# Altium PCB pressure-sensor.PcbDoc
Units mm, origin at the board's own origin, x right, y up, seen from the top; angles counter-clockwise.
Board outline 19.68 x 10.61 mm, 2 copper layers (Top Layer, Bottom Layer); 2 components, 6 nets, 12 pads, 0 vias.
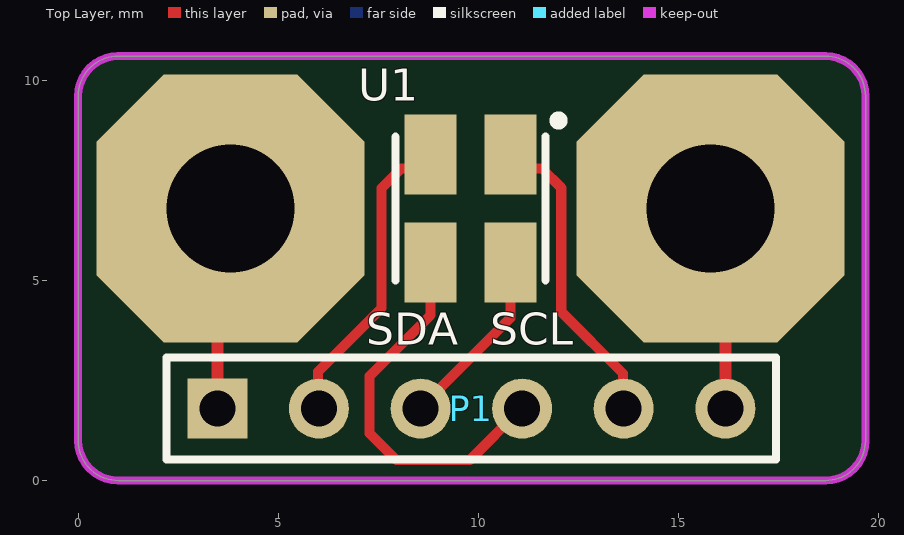
[diagram p0: Top Layer view]
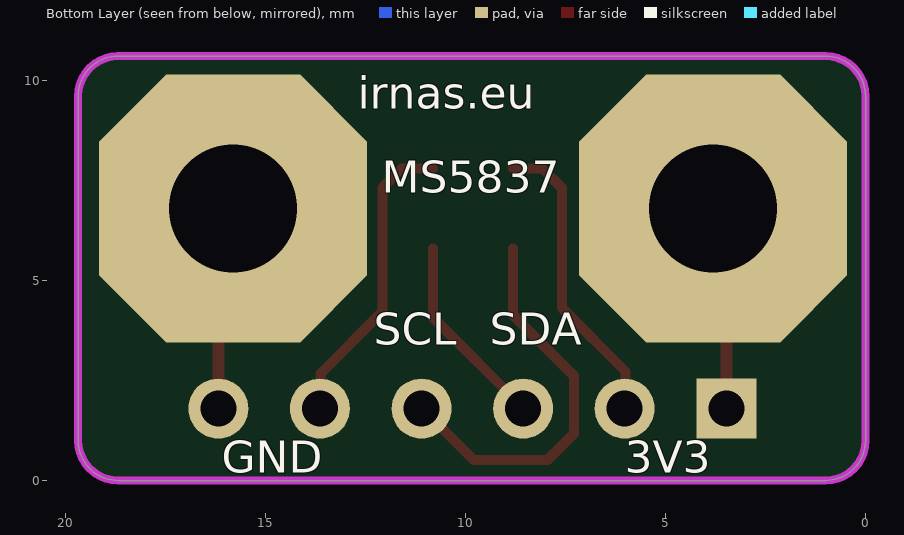
[diagram p1: Bottom Layer view, seen from below]

## Layer stack, top to bottom
Top Solder: solder mask 0.0102, Solder Resist, Dk 3.5
Top Layer: signal copper 0.0356
Dielectric 1: dielectric 0.32, FR-4, Dk 4.8
Bottom Layer: signal copper 0.0356
Bottom Solder: solder mask 0.0102, Solder Resist, Dk 3.5

## Board outline
0,1 0,9.61 cw(c1,9.61) 1,10.61 18.685,10.61 cw(c18.685,9.61) 19.685,9.61 19.685,1 cw(c18.685,1) 18.685,0 1,0 cw(c1,1)

## Design rules (kind name [scope] priority, off if disabled: settings)
Clearance [All] p1: gap=0.254 ignorepadtopadclearanceinfootprint=FALSE except(0: Arc-Hole Track-Hole SMDPad-Hole THPad-Hole Via-Hole Fill-Hole Poly-Hole Region-Hole Text-Hole)
HoleSize [All] p1: absolutevalues=TRUE maxlimit=3.5 minlimit=0.025 maxpercent=80.000 minpercent=20.000
PolygonConnect [All] p1: connectstyle=Relief reliefconductorwidth=0.254 reliefentries=4 polygonreliefangle="90 Angle" airgapwidth=0.254
RoutingVias [All] p1: holewidth=0.711 width=1.27 viastyle="Through Hole" minholewidth=0.711 minwidth=1.27 maxholewidth=0.711 maxwidth=1.27
SolderMaskExpansion [All] p1: expansion=0.102
Width [All] p1: maxlimit=1.27 minlimit=0.254 preferedwidth=0.762
29 further rules are at their usual default settings.

## Components (designator, comment, footprint, x,y, rotation, side; value= is the part's Value field where it differs from the comment)
P1 "Header 6" HDR1X6 3.48,1.8 r0 top
U1 "MS5837" MS5837 9.81,6.8 r270 top

## Footprints (in the part's own frame and the unit in brackets; to place one, negate y for a bottom-side part, rotate by r counter-clockwise, add the part's x,y. Pads: shape width x height; smd on the part's side, far side on the other; paste and mask are expansions set on the pad)
HDR1X6 [mm] "Connector; Header; 6 Position"
  rect 1.5x1.5 hole 0.9: 1(0,0)
  round 1.5 hole 0.9: 2(2.54,0) 3(5.08,0) 4(7.62,0) 5(10.16,0) 6(12.7,0)
  silkscreen extent -1.27,-1.27 13.97,1.27
MS5837 [mm]
  rect 2x1.3 smd: 1(-1.35,1) 2(-1.35,-1) 3(1.35,-1) 4(1.35,1)
  silkscreen extent -2.3,-1.88 1.8,2.3

## Part data
P1: "Header, 6-Pin", LatestRevisionDate=17-Jul-2002, LatestRevisionNote="Re-released for DXP Platform.", Publisher="Altium Limited"
U1: library part MS583730BA01-50, Manufacturer="TE Connectivity", ComponentLink1Description=http://www.te.com/commerce/DocumentDelivery/DDEController?Action=srchrtrv&DocNm=MS5837-30BA&DocType=Data+Sheet&DocLang=English, ComponentLink1URL=http://www.te.com/commerce/DocumentDelivery/DDEController?Action=srchrtrv&DocNm=MS5837-30BA&DocType=Data+Sheet&DocLang=English, Manufacturer Part Number=MS583730BA01-50, Pricing 1="1=28.45, 5=20.76, 10=18.74, 25=16.52, 50=15.21 (EUR)", Stock 1=723, Supplier 1=Farnell

## Free pads (board coordinates)
  oct 6.7x6.7 hole 3.2: 0(3.81,6.8) 0(15.81,6.8)

## Nets (pads, with @x,y where several pads share a name; then routed paths per layer and width w, separated by ;. In a path a pad name is that pad's centre, name@x,y a point inside that pad or via, vN(x,y) a via of type N, cw(c..) or ccw(c..) an arc to the next point about the centre after c; other vN are vias at no path point)
3V3: P1.2 U1.2 | length 7.6
  Top Layer w0.254: P1.2@6,1.8 6,2.725 7.585,4.31 7.585,7.31 8.075,7.8 U1.2@8.81,7.8
GND: P1.5 U1.1 | length 7.6
  Top Layer w0.254: U1.1@10.81,7.8 11.595,7.8 12.079,7.316 12.079,4.216 13.62,2.675 P1.5@13.62,1.8
S1: P1.1 pad.0@3.81,6.8 | length 5.1
  Top Layer w0.3: P1.1 3.48,6.47 pad.0@3.81,6.8
S2: P1.6 pad.0@15.81,6.8 | length 5.2
  Top Layer w0.3: pad.0@15.81,6.8 16.18,6.43 P1.6
SCL: P1.4 U1.3 | length 9.9
  Top Layer w0.254: U1.3@8.81,5.8 8.81,4.135 7.285,2.61 7.285,1.183 7.958,0.51 9.79,0.51 P1.4@11.08,1.8
SDA: P1.3 U1.4 | length 4.9
  Top Layer w0.254: P1.3@8.54,1.8 10.81,4.07 U1.4@10.81,5.8

## Keep-outs
Keep-Out Layer:
  the board outline again, w0.203

## Other copper
Top Layer:
  region: 3.48,1.8

## Silkscreen, mask and mechanical layers (free items; w line width, h text height)
Top Overlay:
  text "SDA" at 7.2,3.4 h0.8
  text "SCL" at 10.3,3.4 h0.8
Bottom Overlay:
  text "irnas.eu" at 12.7,9.3 h0.8
  text "MS5837" at 12.1,7.2 h0.8
  text "SDA" at 9.4,3.4 h0.8
  text "SCL" at 12.3,3.4 h0.8
  text "3V3" at 6.02,0.2 h0.8
  text "GND" at 16.1,0.2 h0.8

## Dimensions
18.685,10.61 to 18.685,0 on Mechanical 1
0,9.61 to 19.685,9.61 on Mechanical 1